# Altium PCB PCB_RX.PcbDoc (part 2 of 2)
Units mm, origin at the board's own origin, x right, y up, seen from the top; angles counter-clockwise.
Board outline 85 x 54.6 mm, 2 copper layers (Top Layer, Bottom Layer); 126 components, 66 nets, 378 pads, 157 vias.
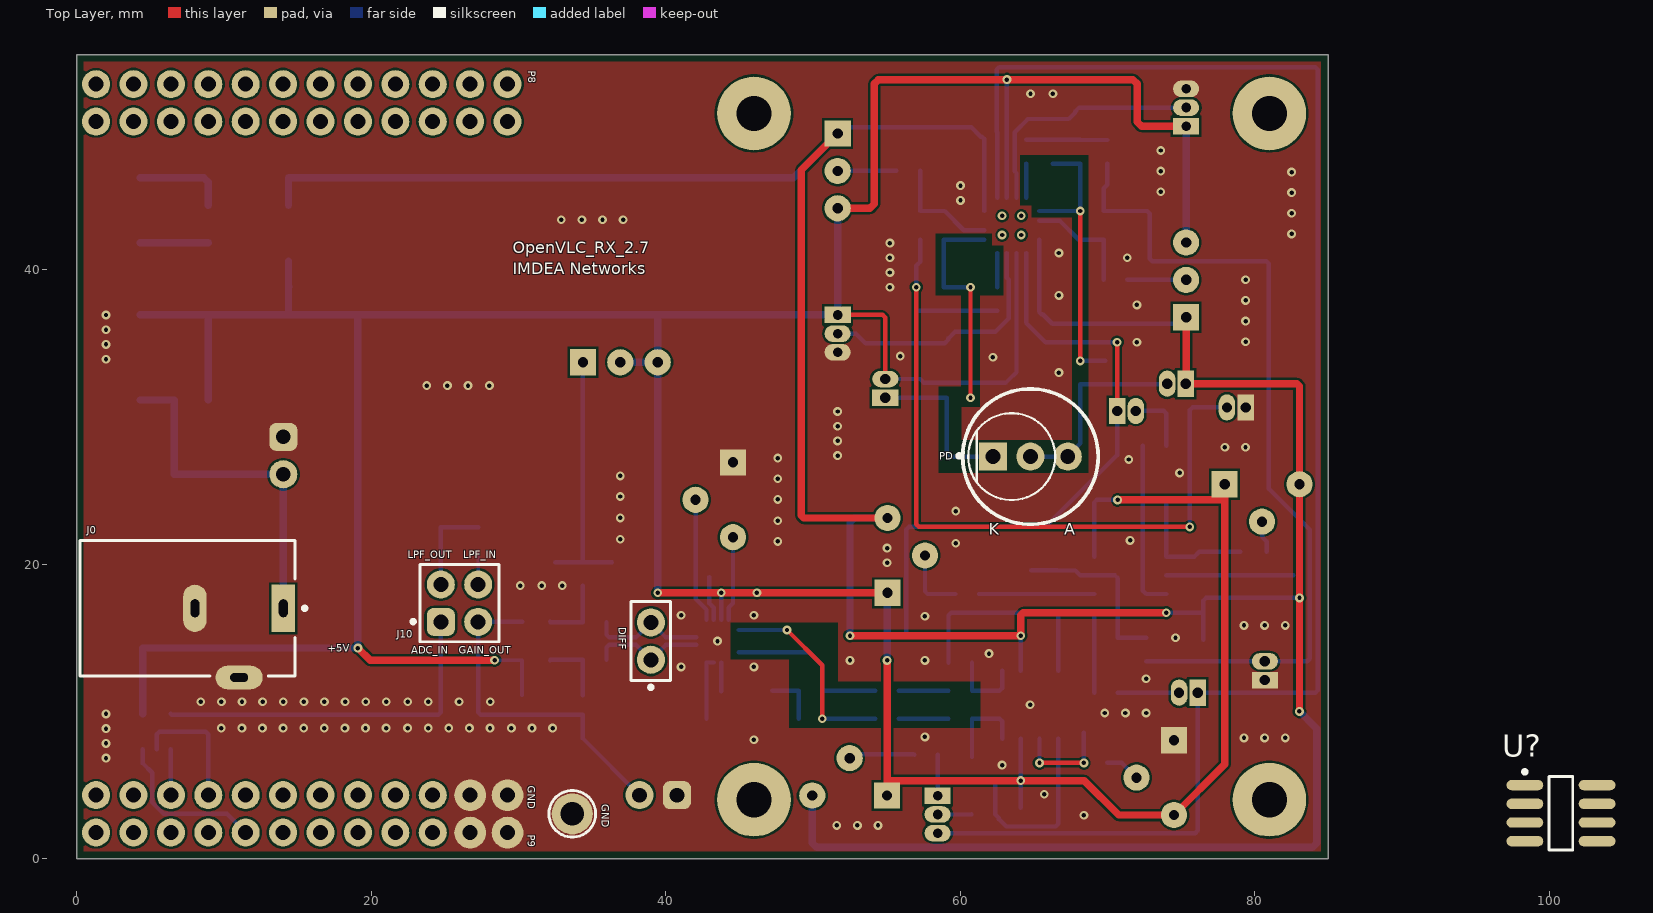
[diagram p0: Top Layer view]

## Silkscreen, mask and mechanical layers (free items; w line width, h text height) (continued)
Bottom Overlay: (continued)
  text "AGC_SET" at 48.5,24.381 h0.5 r270
  text "+eOP" at 57.197,13.94 h0.5
  text "ALC" at 76.158,12.828 h0.5
  text "OPEN" at 82.241,11.853 h0.5 r270
  text "VREF" at 56.355,2.521 h0.5 r270
  text "GAIN_OUT" at 39.638,0.68 h0.5
  text "GND" at 41.461,0.68 h0.5
  text "-eOP" at 56.355,0.461 h0.5 r270
Mechanical 1:
  the board outline again, w0.254

## Text inside footprints (layer, text, board x,y; h text height)
C2: Bottom Overlay "+" at 8.424,26.615 h1.2 r180
C11: Bottom Overlay "+" at 4.829,40.037 h1.2 r90
C12: Bottom Overlay "+" at 18.039,43.116 h1.2 r90